# EAGLE board PinguinoUCAB (EAGLE 6.1)
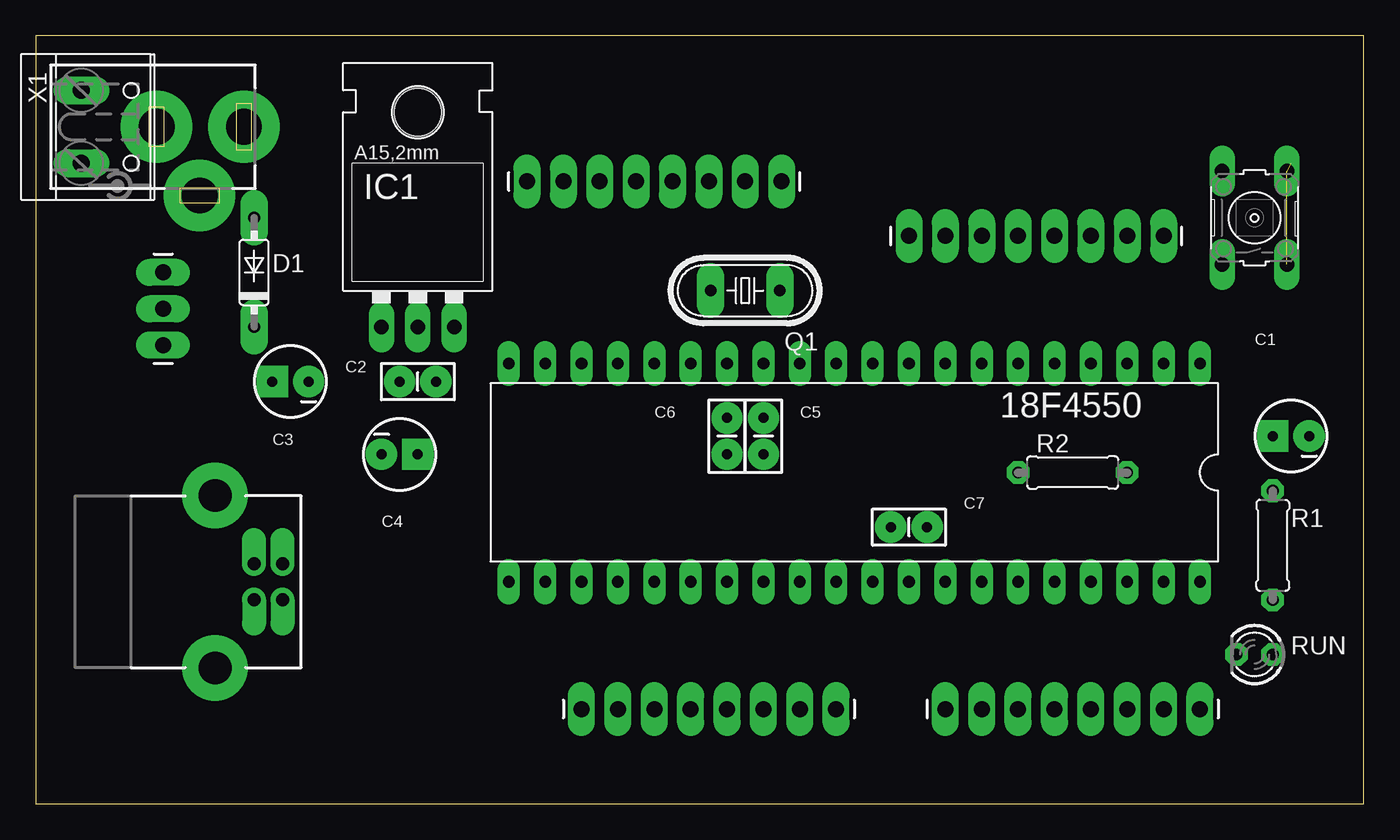
[diagram p0: board, top side]
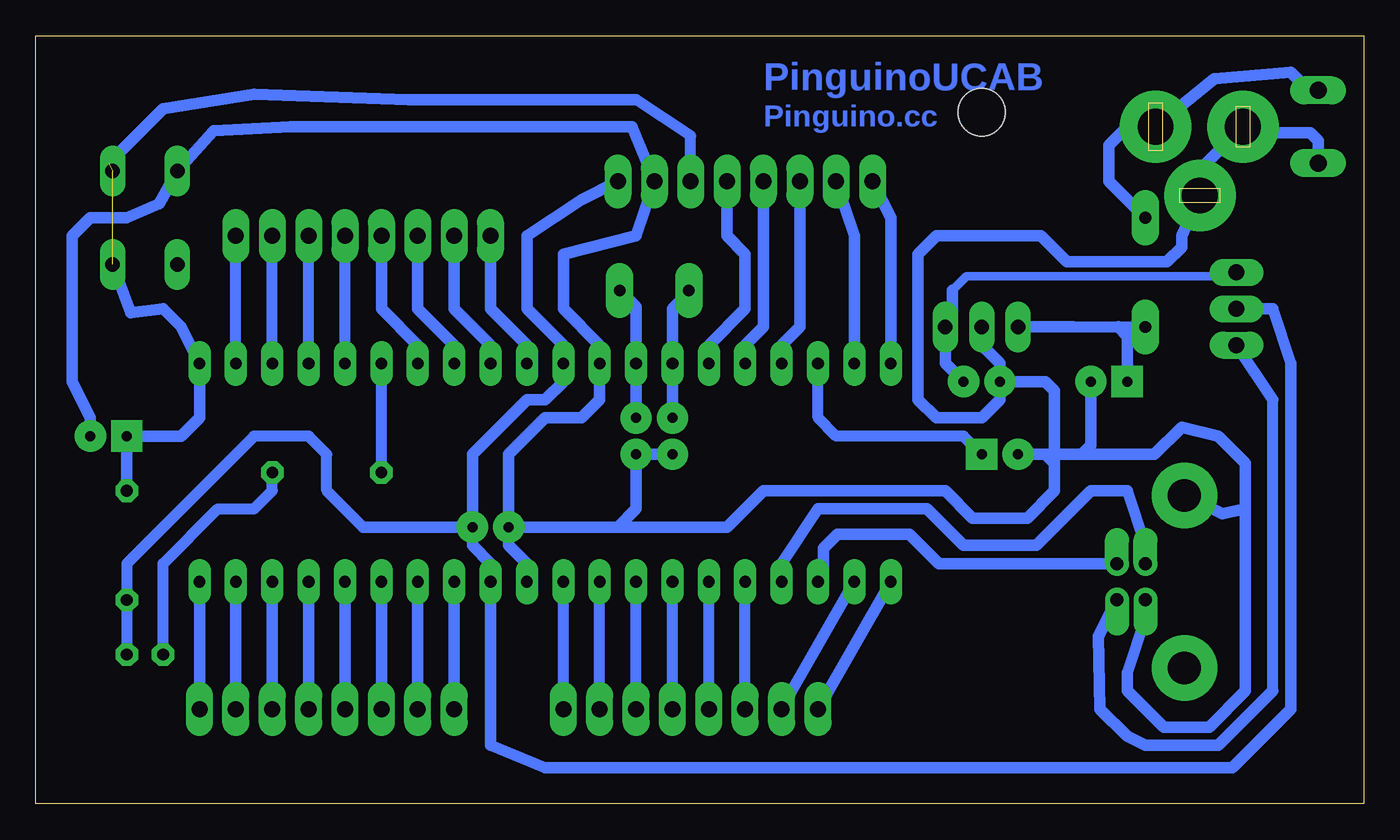
[diagram p1: board, bottom side, seen from below]

Size 92.71 x 53.61 mm. Coordinates in mm from the lower left corner, seen from the top.
Outline: 0,0 92.71,0 92.71,53.61 0,53.6 0,0
Copper layers (1*16): Top 0.035mm / dielectric 1.5mm / Bottom 0.035mm
Design rules: minimum track width 10mil, minimum drill 24mil, track to track 8mil, track to pad 8mil, pad to pad 8mil, via to via 8mil, smd to smd 8mil, copper to edge 40mil, drill to drill 8mil, minimum pad ring 15mil, minimum via ring 20mil, stop-mask expansion 4mil, vias tented up to drill 0mil, thermal gap 60mil

## Footprints (pad centres in the part's own frame; a part is rotated, then mirrored left to right if it is on the bottom)
DIL40 = drill 0.813 long: 1 -24.13,-7.62; 2 -21.59,-7.62; 3 -19.05,-7.62; 4 -16.51,-7.62; 5 -13.97,-7.62; 6 -11.43,-7.62; 7 -8.89,-7.62; 8 -6.35,-7.62; 9 -3.81,-7.62; 10 -1.27,-7.62; 11 1.27,-7.62; 12 3.81,-7.62; 13 6.35,-7.62; 14 8.89,-7.62; 15 11.43,-7.62; 16 13.97,-7.62; 17 16.51,-7.62; 18 19.05,-7.62; 19 21.59,-7.62; 20 24.13,-7.62; 21 24.13,7.62; 22 21.59,7.62; 23 19.05,7.62; 24 16.51,7.62; 25 13.97,7.62; 26 11.43,7.62; 27 8.89,7.62; 28 6.35,7.62; 29 3.81,7.62; 30 1.27,7.62; 31 -1.27,7.62; 32 -3.81,7.62; 33 -6.35,7.62; 34 -8.89,7.62; 35 -11.43,7.62; 36 -13.97,7.62; 37 -16.51,7.62; 38 -19.05,7.62; 39 -21.59,7.62; 40 -24.13,7.62
CPOL-RADIAL-10UF-25V = drill 0.7 pad 2.184 square: 1 1.27,0 | drill 0.7 pad 2.184: 2 -1.27,0
CAP-PTH-SMALL2 = drill 0.7 pad 2.184: 1 0,0; 2 2.54,0
DO35-7 = drill 0.813 pad 1.93 long: A 3.81,0; C -3.81,0
DCJ0303 = drill 2.5 pad 5: 1 0,3.1; 2 4.8,0; 3 0,-3
78XXL = drill 1.016 long: GND 0,-3.81; IN -2.54,-3.81; OUT 2.54,-3.81 | hole 3.302: 0,11.176
1X08_LONGPADS = drill 1.118 pad 1.88 long: 1 0,0; 2 2.54,0; 3 5.08,0; 4 7.62,0; 5 10.16,0; 6 12.7,0; 7 15.24,0; 8 17.78,0
1X03_LONGPADS = drill 1.118 pad 1.88 long: 1 0,0; 2 2.54,0; 3 5.08,0
HC49U-V = drill 0.813 pad 1.93 long: 1 -2.413,0; 2 2.413,0
0207/7 = drill 0.813 octagon: 1 -3.81,0; 2 3.81,0
B3F-10XX = drill 1.016 long: 1 -3.251,2.261; 2 3.251,2.261; 3 -3.251,-2.261; 4 3.251,-2.261
LED3MM = drill 0.813 octagon: A -1.27,0; K 1.27,0
USB-B-PTH = drill 0.914 pad 1.676 offset: D+ 0,1.25; D- 1.981,1.25; GND 0,-1.25; VBUS 1.981,-1.25 | drill 2.286 pad 4.572: S1 -2.718,-6.02; S2 -2.718,6.02
W237-132 = drill 1.194 long: 1 -2.54,-0.635; 2 2.54,-0.635

## Placement (x,y rotation side)
18F4550  [DIL40]  57.15,23.13 180 top
C1  10uf/50v  [CPOL-RADIAL-10UF-25V]  87.63,25.67 180 top
C2  0.1uf  [CAP-PTH-SMALL2]  27.94,29.48 180 top
C3  0.33uf/50v  [CPOL-RADIAL-10UF-25V]  17.78,29.48 180 top
C4  0.22uf/50v  [CPOL-RADIAL-10UF-25V]  25.4,24.4 0 top
C5  22pf  [CAP-PTH-SMALL2]  50.8,26.94 270 top
C6  22pf  [CAP-PTH-SMALL2]  48.26,26.94 270 top
C7  0.1uf  [CAP-PTH-SMALL2]  62.23,19.32 180 top
CC_TEXT1  CREATIVE_COMMONS  [CREATIVE_COMMONS]  27.3,-8.62 0 top  (outside the outline)
D1  4007  [DO35-7]  15.24,37.1 90 top
DC-IN  [DCJ0303]  11.43,47.26 270 top
IC1  7805  [78XXL]  26.67,37.1 0 top
JP1  [1X08_LONGPADS]  63.5,6.62 0 top
JP2  [1X08_LONGPADS]  38.1,6.62 0 top
JP3  [1X03_LONGPADS]  8.89,32.02 90 top
JP4  [1X08_LONGPADS]  78.74,39.64 180 top
JP5  [1X08_LONGPADS]  52.07,43.45 180 top
Q1  20MHz  [HC49U-V]  49.53,35.83 180 top
R1  10k  [0207/7]  86.36,18.05 270 top
R2  470  [0207/7]  72.39,23.13 0 top
RESET  [B3F-10XX]  85.09,40.91 90 top
RUN  green  [LED3MM]  85.09,10.43 180 top
USB  [USB-B-PTH]  15.24,15.51 0 top
X1  [W237-132]  3.81,47.26 270 top

## Library data of the parts
18F4550 = microchip; DIGIKEY: PIC18F4550-I/P-ND; MF: MICROCHIP; MPN: PIC18F4550-I/P; OC_FARNELL: 9321357; OC_NEWARK: 74K8623
C1-C7 JP1-JP5 USB = SparkFun
CC_TEXT1 = SparkFun-Aesthetics
D1 = diode
DC-IN = jack; OC_FARNELL: unknown; OC_NEWARK: unknown
IC1 = v-reg
Q1 = crystal; OC_FARNELL: 1666969; OC_NEWARK: unknown
R1 R2 = resistor
RESET = switch-omron; MPN: B3F-1000; OC_FARNELL: 176432; OC_NEWARK: 36M3542
RUN = led
X1 = con-wago-508; OC_FARNELL: unknown; OC_NEWARK: unknown

## Nets
+5V: 18F4550.11 18F4550.32 C7.1 JP3.2 JP5.1 R1.2 RUN.A
D+: 18F4550.24 USB.D+
D-: 18F4550.23 USB.D-
GND: 18F4550.12 18F4550.31 C1.2 C2.2 C3.2 C4.2 C5.2 C6.2 C7.2 DC-IN.2 DC-IN.3 IC1.GND JP5.2 RESET.2 USB.GND USB.S2 X1.2
N$1: 18F4550.13 C5.1 Q1.1
N$2: C3.1 D1.C IC1.IN
N$3: C2.1 IC1.OUT JP3.3
N$4: JP3.1 USB.VBUS
N$5: 18F4550.14 C6.1 Q1.2
N$6: 18F4550.18 C4.1
N$7: R2.2 RUN.K
N$8: 18F4550.6 R2.1
N$11: D1.A DC-IN.1 X1.1
PIN0: 18F4550.33 JP1.1
PIN1: 18F4550.34 JP1.2
PIN2: 18F4550.35 JP1.3
PIN3: 18F4550.36 JP1.4
PIN4: 18F4550.37 JP1.5
PIN5: 18F4550.38 JP1.6
PIN6: 18F4550.39 JP1.7
PIN7: 18F4550.40 JP1.8
PIN8: 18F4550.25 JP2.3
PIN9: 18F4550.26 JP2.4
PIN10: 18F4550.15 JP5.4
PIN11: 18F4550.16 JP5.5
PIN12: 18F4550.17 JP5.6
PIN13: 18F4550.2 JP4.1
PIN14: 18F4550.3 JP4.2
PIN15: 18F4550.4 JP4.3
PIN16: 18F4550.5 JP4.4
PIN17: 18F4550.7 JP4.5
PIN18: 18F4550.8 JP4.6
PIN19: 18F4550.9 JP4.7
PIN20: 18F4550.10 JP4.8
PIN21: 18F4550.19 JP5.7
PIN22: 18F4550.20 JP5.8
PIN23: 18F4550.21 JP2.1
PIN24: 18F4550.22 JP2.2
PIN25: 18F4550.27 JP2.5
PIN26: 18F4550.28 JP2.6
PIN27: 18F4550.29 JP2.7
PIN28: 18F4550.30 JP2.8
RESET: 18F4550.1 C1.1 JP5.3 R1.1 RESET.3 RESET.4

## Tracks (layer width: path | path; a pad name or v marks a point on that pad's centre or on a via)
+5V
  Bottom 0.762: 69.85,19.32 72.39,21.86 72.39,24.4 73.66,25.67 77.47,25.67 86.36,16.78 R1.2 RUN.A
  Bottom 0.813: C7.1 69.85,19.32 | C7.1 62.23,18.05 60.96,16.78 18F4550.32 60.96,4.08 57.15,2.54 9.16,2.54 5.08,6.62 5.08,30.75 6.35,34.56 JP3.2 | JP5.1 54.61,42.18 58.42,39.64 58.42,34.56 55.88,32.02 18F4550.11 55.88,29.48 57.15,28.21 58.42,28.21 62.23,24.4 C7.1
D+
  Bottom 0.813: 18F4550.24 40.64,16.78 38.1,20.59 30.48,20.59 27.94,18.05 22.86,18.05 19.05,21.86 16.51,21.86 15.24,18.05 USB.D+
D-
  Bottom 0.813: 18F4550.23 37.73,15.88 37.73,17.84 36.73,18.84 31.73,18.84 29.65,16.76 USB.D-
GND
  Bottom 0.762: C2.2 25.4,28.21
  Bottom 0.813: 21.59,23.76 21.59,28.85 22.23,29.48 C2.2 25.4,30.75 26.67,32.02 IC1.GND | 22.23,24.4 C4.2 | 22.23,24.4 21.59,23.76 | 19.68,24.4 22.23,24.4 | 19.68,24.4 14.61,24.4 12.7,26.31 10.16,25.67 8.26,23.76 8.26,20.59 | C3.2 19.05,25.04 19.68,24.4 | 25.4,28.21 26.67,26.94 29.84,26.94 31.11,28.21 31.11,38.37 29.84,39.64 22.53,39.64 20.73,37.84 13.73,37.84 12.7,38.87 12.7,39.64 DC-IN.2 11.43,44.26 DC-IN.3 8.01,46.84 3.73,46.84 3.18,46.28 X1.2 | 21.59,23.76 21.59,21.86 23.5,19.95 27.3,19.95 29.21,21.86 41.91,21.86 44.45,19.32 52.07,19.32 | 8.26,20.59 8.26,7.89 10.79,5.35 13.97,5.35 16.51,7.89 16.51,9.16 15.24,12.97 USB.GND | 52.07,19.32 C7.2 | C7.2 59.69,24.4 57.15,26.94 54.61,26.94 53.34,28.21 18F4550.12 53.34,32.02 55.88,34.56 55.88,38.37 50.8,39.64 JP5.2 51.07,47.26 74.93,47.26 80.29,46.98 RESET.2 84.1,41.9 86.36,40.91 88.9,40.91 90.17,39.64 90.17,29.48 88.9,26.94 C1.2 | C7.2 59.69,18.05 58.42,16.78 18F4550.31 | USB.S2 9.86,20.26 8.26,20.59 | 52.07,19.32 50.8,20.59 C5.2 C6.2
N$1
  Bottom 0.813: 50.67,30.62 18F4550.13 | 18F4550.13 50.8,34.69 Q1.1 | C5.1 18F4550.13
N$2
  Bottom 0.762: D1.C 17.14,33.29 20.32,33.29
  Bottom 0.813: 20.32,33.29 IC1.IN | C3.1 16.51,32.66 17.14,33.29
N$3
  Bottom 0.61: 9.73,36.84 27.73,36.84 28.73,35.84
  Bottom 0.813: JP3.3 9.47,37.1 9.73,36.84 | 28.73,35.84 28.73,33.77 IC1.OUT 29.21,30.75 C2.1
N$4
  Bottom 0.762: 6.35,7.89 6.35,28.21
  Bottom 0.813: 6.35,7.89 10.16,4.08 15.24,4.08 16.51,4.71 18.41,6.62 18.51,11.7 USB.VBUS | 6.35,28.21 JP3.1
N$5
  Bottom 0.813: Q1.2 47.12,35.7 48.26,34.56 18F4550.14 C6.1
N$6
  Bottom 0.762: 18F4550.18 38.1,26.94 36.83,25.67 27.94,25.67 C4.1
N$7
  Bottom 0.762: RUN.K 83.82,16.78 80.01,20.59 77.47,20.59 76.2,21.86 R2.2
N$8
  Bottom 0.762: R2.1 18F4550.6
N$11
  Bottom 0.813: X1.1 4.45,50.44 5.08,51.07 10.43,50.63 DC-IN.1 16.51,47.26 17.78,45.99 17.78,43.45 D1.A
PIN0
  Bottom 0.813: JP1.1 18F4550.33
PIN1
  Bottom 0.813: JP1.2 18F4550.34
PIN2
  Bottom 0.813: JP1.3 18F4550.35
PIN3
  Bottom 0.813: JP1.4 18F4550.36
PIN4
  Bottom 0.813: JP1.5 18F4550.37
PIN5
  Bottom 0.813: JP1.6 18F4550.38
PIN6
  Bottom 0.813: JP1.7 18F4550.39
PIN7
  Bottom 0.813: JP1.8 18F4550.40
PIN8
  Bottom 0.762: JP2.3 18F4550.25
PIN9
  Bottom 0.762: JP2.4 18F4550.26
PIN10
  Bottom 0.813: 18F4550.15 45.72,32.02 43.18,34.56 43.18,38.37 44.45,39.64 JP5.4
PIN11
  Bottom 0.813: 18F4550.16 43.18,32.02 41.91,33.29 JP5.5
PIN12
  Bottom 0.813: 18F4550.17 40.64,32.02 39.37,33.29 JP5.6
PIN13
  Bottom 0.762: 18F4550.2 JP4.1
PIN14
  Bottom 0.762: 18F4550.3 JP4.2
PIN15
  Bottom 0.762: 18F4550.4 JP4.3
PIN16
  Bottom 0.762: 18F4550.5 JP4.4
PIN17
  Bottom 0.813: 18F4550.7 66.04,32.02 68.58,34.56 JP4.5
PIN18
  Bottom 0.813: 18F4550.8 63.5,32.02 66.04,34.56 JP4.6
PIN19
  Bottom 0.813: 18F4550.9 60.96,32.02 63.5,34.56 JP4.7
PIN20
  Bottom 0.813: 18F4550.10 58.42,32.02 60.96,34.56 JP4.8
PIN21
  Bottom 0.813: 18F4550.19 35.56,39.64 JP5.7
PIN22
  Bottom 0.813: 18F4550.20 33.02,40.91 JP5.8
PIN23
  Bottom 0.813: JP2.1 18F4550.21
PIN24
  Bottom 0.762: JP2.2 18F4550.22
PIN25
  Bottom 0.762: JP2.5 18F4550.27
PIN26
  Bottom 0.762: JP2.6 18F4550.28
PIN27
  Bottom 0.762: JP2.7 18F4550.29
PIN28
  Bottom 0.762: JP2.8 18F4550.30
RESET  (2 unrouted)
  Bottom 0.762: 83.82,34.56 82.55,33.29 18F4550.1 | JP5.3 46.99,46.62 50.8,49.17
  Bottom 0.813: 50.8,49.17 66.67,49.17 77.47,49.53 83.82,48.53 87.63,44.72 | R1.1 C1.1 82.55,25.67 81.28,26.94 18F4550.1 | 83.82,34.56 86.08,34.28 RESET.3

## Text on the board
Top: Yoshua Nava, Jonathan Teixeira
Bottom: PinguinoUCAB | Pinguino.cc
tDocu: PinguinoUCAB | Reset | PWM | PWM | RST | GND | 5v | Puertos Analógicos | A7 | A6 | A5 | A4 | A3 | A2 | A1 | A0 | + | - | DC-IN | POWER | USB | SDA | SCL | TX | RX